# EAGLE board LEDSubMatrixHighDensity_scripttesting (EAGLE 9.6.2), part 1 of 2
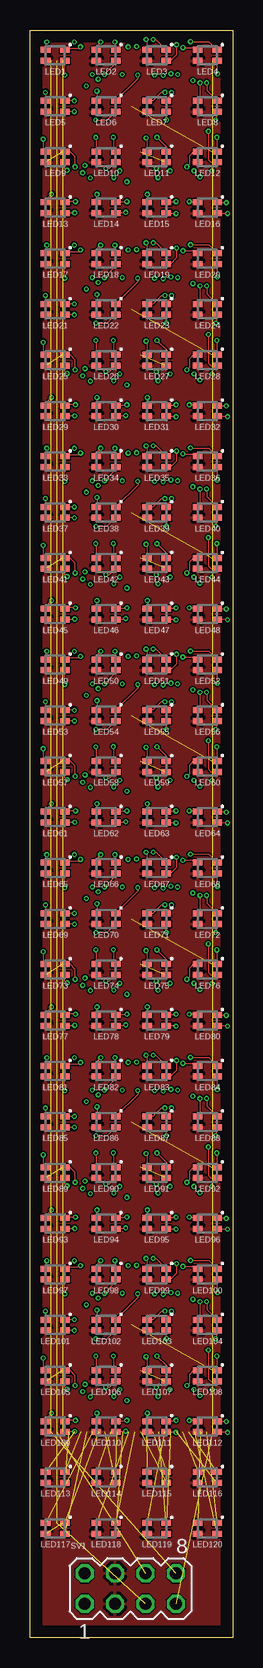
[diagram p0: board, top side]
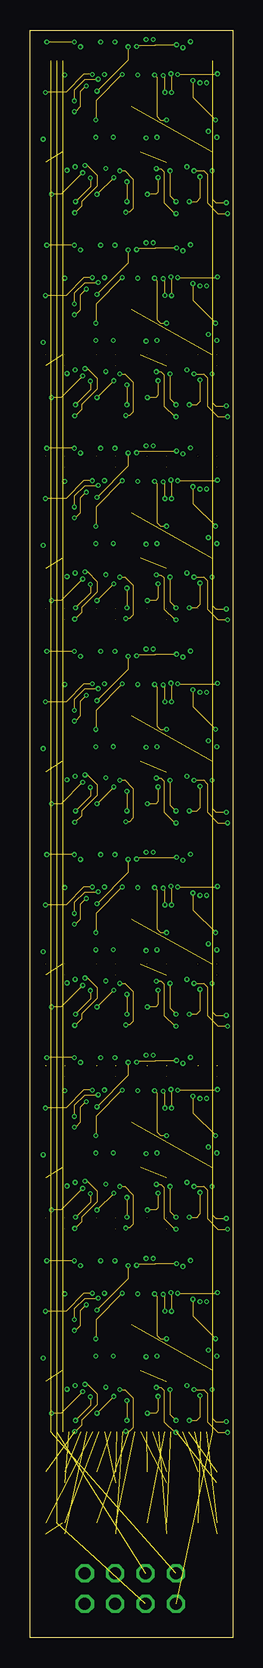
[diagram p1: board, inner layer InnerBottom]
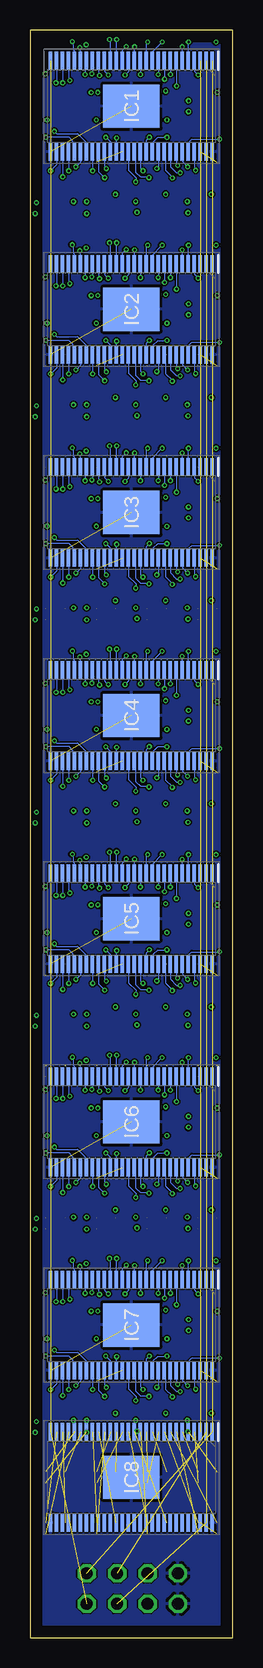
[diagram p2: board, bottom side, seen from below]

Size 16.93 x 134 mm. Coordinates in mm from the lower left corner, seen from the top.
Outline: 0,134 16.93,134 16.93,0 0,0 0,134
Copper layers (1+2*15+16): Top 0.035mm / dielectric 0.2mm / InnerTop 0.0175mm / dielectric 1.065mm / InnerBottom 0.0175mm / dielectric 0.2mm / Bottom 0.035mm
Design rules "jlcpcb_4layer_1oz": minimum track width 3.5mil, minimum drill 0.2mm, track to track 5mil, track to pad 0.2mm, pad to pad 5mil, via to via 6mil, smd to smd 5mil, copper to edge 40mil, drill to drill 6mil, minimum pad ring 10mil, minimum via ring 0.1mm, stop-mask expansion 4mil, vias tented up to drill 0mil, thermal gap 10mil

## Footprints (pad centres in the part's own frame; a part is rotated, then mirrored left to right if it is on the bottom)
SOP50P810X120-57N = smd 1.475 x 0.3: 1 -3.788,6.75; 2 -3.788,6.25; 3 -3.788,5.75; 4 -3.788,5.25; 5 -3.788,4.75; 6 -3.788,4.25; 7 -3.788,3.75; 8 -3.788,3.25; 9 -3.788,2.75; 10 -3.788,2.25; 11 -3.788,1.75; 12 -3.788,1.25; 13 -3.788,0.75; 14 -3.788,0.25; 15 -3.788,-0.25; 16 -3.788,-0.75; 17 -3.788,-1.25; 18 -3.788,-1.75; 19 -3.788,-2.25; 20 -3.788,-2.75; 21 -3.788,-3.25; 22 -3.788,-3.75; 23 -3.788,-4.25; 24 -3.788,-4.75; 25 -3.788,-5.25; 26 -3.788,-5.75; 27 -3.788,-6.25; 28 -3.788,-6.75; 29 3.788,-6.75; 30 3.788,-6.25; 31 3.788,-5.75; 32 3.788,-5.25; 33 3.788,-4.75; 34 3.788,-4.25; 35 3.788,-3.75; 36 3.788,-3.25; 37 3.788,-2.75; 38 3.788,-2.25; 39 3.788,-1.75; 40 3.788,-1.25; 41 3.788,-0.75; 42 3.788,-0.25; 43 3.788,0.25; 44 3.788,0.75; 45 3.788,1.25; 46 3.788,1.75; 47 3.788,2.25; 48 3.788,2.75; 49 3.788,3.25; 50 3.788,3.75; 51 3.788,4.25; 52 3.788,4.75; 53 3.788,5.25; 54 3.788,5.75; 55 3.788,6.25; 56 3.788,6.75 | smd 3.61 x 4.7: 57 0,0
B38G3RGB = smd 0.8 x 0.5: 1 0.8,0.45; 2 0.8,-0.45; 3 -0.8,-0.45; 4 -0.8,0.45
MA04-2 = drill 1.016 octagon: 1 -3.81,-1.27; 2 -3.81,1.27; 3 -1.27,-1.27; 4 -1.27,1.27; 5 1.27,-1.27; 6 1.27,1.27; 7 3.81,-1.27; 8 3.81,1.27

## Placement (x,y rotation side)
IC1  TLC5955DCAR  [SOP50P810X120-57N]  8.47,127.65 270 bottom
IC2  TLC5955DCAR  [SOP50P810X120-57N]  8.47,110.72 270 bottom
IC3  TLC5955DCAR  [SOP50P810X120-57N]  8.47,93.78 270 bottom
IC4  TLC5955DCAR  [SOP50P810X120-57N]  8.47,76.85 270 bottom
IC5  TLC5955DCAR  [SOP50P810X120-57N]  8.47,59.92 270 bottom
IC6  TLC5955DCAR  [SOP50P810X120-57N]  8.47,42.98 270 bottom
IC7  TLC5955DCAR  [SOP50P810X120-57N]  8.47,26.05 270 bottom
IC8  TLC5955DCAR  [SOP50P810X120-57N]  8.47,13.35 270 bottom
LED1  B38G3RGB  [B38G3RGB]  2.12,131.88 0 top
LED2  B38G3RGB  [B38G3RGB]  6.35,131.88 0 top
LED3  B38G3RGB  [B38G3RGB]  10.58,131.88 0 top
LED4  B38G3RGB  [B38G3RGB]  14.82,131.88 0 top
LED5  B38G3RGB  [B38G3RGB]  2.12,127.65 0 top
LED6  B38G3RGB  [B38G3RGB]  6.35,127.65 0 top
LED7  B38G3RGB  [B38G3RGB]  10.58,127.65 0 top
LED8  B38G3RGB  [B38G3RGB]  14.82,127.65 0 top
LED9  B38G3RGB  [B38G3RGB]  2.12,123.42 0 top
LED10  B38G3RGB  [B38G3RGB]  6.35,123.42 0 top
LED11  B38G3RGB  [B38G3RGB]  10.58,123.42 0 top
LED12  B38G3RGB  [B38G3RGB]  14.82,123.42 0 top
LED13  B38G3RGB  [B38G3RGB]  2.12,119.18 0 top
LED14  B38G3RGB  [B38G3RGB]  6.35,119.18 0 top
LED15  B38G3RGB  [B38G3RGB]  10.58,119.18 0 top
LED16  B38G3RGB  [B38G3RGB]  14.82,119.18 0 top
LED17  B38G3RGB  [B38G3RGB]  2.12,114.95 0 top
LED18  B38G3RGB  [B38G3RGB]  6.35,114.95 0 top
LED19  B38G3RGB  [B38G3RGB]  10.58,114.95 0 top
LED20  B38G3RGB  [B38G3RGB]  14.82,114.95 0 top
LED21  B38G3RGB  [B38G3RGB]  2.12,110.72 0 top
LED22  B38G3RGB  [B38G3RGB]  6.35,110.72 0 top
LED23  B38G3RGB  [B38G3RGB]  10.58,110.72 0 top
LED24  B38G3RGB  [B38G3RGB]  14.82,110.72 0 top
LED25  B38G3RGB  [B38G3RGB]  2.12,106.48 0 top
LED26  B38G3RGB  [B38G3RGB]  6.35,106.48 0 top
LED27  B38G3RGB  [B38G3RGB]  10.58,106.48 0 top
LED28  B38G3RGB  [B38G3RGB]  14.82,106.48 0 top
LED29  B38G3RGB  [B38G3RGB]  2.12,102.25 0 top
LED30  B38G3RGB  [B38G3RGB]  6.35,102.25 0 top
LED31  B38G3RGB  [B38G3RGB]  10.58,102.25 0 top
LED32  B38G3RGB  [B38G3RGB]  14.82,102.25 0 top
LED33  B38G3RGB  [B38G3RGB]  2.12,98.02 0 top
LED34  B38G3RGB  [B38G3RGB]  6.35,98.02 0 top
LED35  B38G3RGB  [B38G3RGB]  10.58,98.02 0 top
LED36  B38G3RGB  [B38G3RGB]  14.82,98.02 0 top
LED37  B38G3RGB  [B38G3RGB]  2.12,93.78 0 top
LED38  B38G3RGB  [B38G3RGB]  6.35,93.78 0 top
LED39  B38G3RGB  [B38G3RGB]  10.58,93.78 0 top
LED40  B38G3RGB  [B38G3RGB]  14.82,93.78 0 top
LED41  B38G3RGB  [B38G3RGB]  2.12,89.55 0 top
LED42  B38G3RGB  [B38G3RGB]  6.35,89.55 0 top
LED43  B38G3RGB  [B38G3RGB]  10.58,89.55 0 top
LED44  B38G3RGB  [B38G3RGB]  14.82,89.55 0 top
LED45  B38G3RGB  [B38G3RGB]  2.12,85.32 0 top
LED46  B38G3RGB  [B38G3RGB]  6.35,85.32 0 top
LED47  B38G3RGB  [B38G3RGB]  10.58,85.32 0 top
LED48  B38G3RGB  [B38G3RGB]  14.82,85.32 0 top
LED49  B38G3RGB  [B38G3RGB]  2.12,81.08 0 top
LED50  B38G3RGB  [B38G3RGB]  6.35,81.08 0 top
LED51  B38G3RGB  [B38G3RGB]  10.58,81.08 0 top
LED52  B38G3RGB  [B38G3RGB]  14.82,81.08 0 top
LED53  B38G3RGB  [B38G3RGB]  2.12,76.85 0 top
LED54  B38G3RGB  [B38G3RGB]  6.35,76.85 0 top
LED55  B38G3RGB  [B38G3RGB]  10.58,76.85 0 top
LED56  B38G3RGB  [B38G3RGB]  14.82,76.85 0 top
LED57  B38G3RGB  [B38G3RGB]  2.12,72.62 0 top
LED58  B38G3RGB  [B38G3RGB]  6.35,72.62 0 top
LED59  B38G3RGB  [B38G3RGB]  10.58,72.62 0 top
LED60  B38G3RGB  [B38G3RGB]  14.82,72.62 0 top
LED61  B38G3RGB  [B38G3RGB]  2.12,68.38 0 top
LED62  B38G3RGB  [B38G3RGB]  6.35,68.38 0 top
LED63  B38G3RGB  [B38G3RGB]  10.58,68.38 0 top
LED64  B38G3RGB  [B38G3RGB]  14.82,68.38 0 top
LED65  B38G3RGB  [B38G3RGB]  2.12,64.15 0 top
LED66  B38G3RGB  [B38G3RGB]  6.35,64.15 0 top
LED67  B38G3RGB  [B38G3RGB]  10.58,64.15 0 top
LED68  B38G3RGB  [B38G3RGB]  14.82,64.15 0 top
LED69  B38G3RGB  [B38G3RGB]  2.12,59.92 0 top
LED70  B38G3RGB  [B38G3RGB]  6.35,59.92 0 top
LED71  B38G3RGB  [B38G3RGB]  10.58,59.92 0 top
LED72  B38G3RGB  [B38G3RGB]  14.82,59.92 0 top
LED73  B38G3RGB  [B38G3RGB]  2.12,55.68 0 top
LED74  B38G3RGB  [B38G3RGB]  6.35,55.68 0 top
LED75  B38G3RGB  [B38G3RGB]  10.58,55.68 0 top
LED76  B38G3RGB  [B38G3RGB]  14.82,55.68 0 top
LED77  B38G3RGB  [B38G3RGB]  2.12,51.45 0 top
LED78  B38G3RGB  [B38G3RGB]  6.35,51.45 0 top
LED79  B38G3RGB  [B38G3RGB]  10.58,51.45 0 top
LED80  B38G3RGB  [B38G3RGB]  14.82,51.45 0 top
LED81  B38G3RGB  [B38G3RGB]  2.12,47.22 0 top
LED82  B38G3RGB  [B38G3RGB]  6.35,47.22 0 top
LED83  B38G3RGB  [B38G3RGB]  10.58,47.22 0 top
LED84  B38G3RGB  [B38G3RGB]  14.82,47.22 0 top
LED85  B38G3RGB  [B38G3RGB]  2.12,42.98 0 top
LED86  B38G3RGB  [B38G3RGB]  6.35,42.98 0 top
LED87  B38G3RGB  [B38G3RGB]  10.58,42.98 0 top
LED88  B38G3RGB  [B38G3RGB]  14.82,42.98 0 top
LED89  B38G3RGB  [B38G3RGB]  2.12,38.75 0 top
LED90  B38G3RGB  [B38G3RGB]  6.35,38.75 0 top
LED91  B38G3RGB  [B38G3RGB]  10.58,38.75 0 top
LED92  B38G3RGB  [B38G3RGB]  14.82,38.75 0 top
LED93  B38G3RGB  [B38G3RGB]  2.12,34.52 0 top
LED94  B38G3RGB  [B38G3RGB]  6.35,34.52 0 top
LED95  B38G3RGB  [B38G3RGB]  10.58,34.52 0 top
LED96  B38G3RGB  [B38G3RGB]  14.82,34.52 0 top
LED97  B38G3RGB  [B38G3RGB]  2.12,30.28 0 top
LED98  B38G3RGB  [B38G3RGB]  6.35,30.28 0 top
LED99  B38G3RGB  [B38G3RGB]  10.58,30.28 0 top
LED100  B38G3RGB  [B38G3RGB]  14.82,30.28 0 top
LED101  B38G3RGB  [B38G3RGB]  2.12,26.05 0 top
LED102  B38G3RGB  [B38G3RGB]  6.35,26.05 0 top
LED103  B38G3RGB  [B38G3RGB]  10.58,26.05 0 top
LED104  B38G3RGB  [B38G3RGB]  14.82,26.05 0 top
LED105  B38G3RGB  [B38G3RGB]  2.12,21.82 0 top
LED106  B38G3RGB  [B38G3RGB]  6.35,21.82 0 top
LED107  B38G3RGB  [B38G3RGB]  10.58,21.82 0 top
LED108  B38G3RGB  [B38G3RGB]  14.82,21.82 0 top
LED109  B38G3RGB  [B38G3RGB]  2.12,17.58 0 top
LED110  B38G3RGB  [B38G3RGB]  6.35,17.58 0 top
LED111  B38G3RGB  [B38G3RGB]  10.58,17.58 0 top
LED112  B38G3RGB  [B38G3RGB]  14.82,17.58 0 top
LED113  B38G3RGB  [B38G3RGB]  2.12,13.35 0 top
LED114  B38G3RGB  [B38G3RGB]  6.35,13.35 0 top
LED115  B38G3RGB  [B38G3RGB]  10.58,13.35 0 top
LED116  B38G3RGB  [B38G3RGB]  14.82,13.35 0 top
LED117  B38G3RGB  [B38G3RGB]  2.12,9.12 0 top
LED118  B38G3RGB  [B38G3RGB]  6.35,9.12 0 top
LED119  B38G3RGB  [B38G3RGB]  10.58,9.12 0 top
LED120  B38G3RGB  [B38G3RGB]  14.82,9.12 0 top
SV1  [MA04-2]  8.38,4.08 0 top

## Library data of the parts
IC1-IC8 = TLC5955DCAR; ARROW_PART_NUMBER: TLC5955DCAR; ARROW_PRICE-STOCK: https://www.arrow.com/en/products/tlc5955dcar/texas-instruments; DESCRIPTION: 48ch, 16bit PWM LED Driver with Dot-Correction, Brightness Control, Open/Short Detection; HEIGHT: 1.2mm; MANUFACTURER_NAME: Texas Instruments; MANUFACTURER_PART_NUMBER: TLC5955DCAR; MOUSER_PART_NUMBER: 595-TLC5955DCAR; MOUSER_PRICE-STOCK: https://www.mouser.co.uk/ProductDetail/Texas-Instruments/TLC5955DCAR?qs=%2Fd%252BFzHvH4c3zo%2FeGYG5n7g%3D%3D
LED1-LED120 = B38G3RGB; ARROW_PART_NUMBER: SML-LX0606IGC-TR; ARROW_PRICE-STOCK: https://www.arrow.com/en/products/sml-lx0606igc-tr/lumex; DESCRIPTION: Standard LEDs - SMD Surface Mount LEDs; HEIGHT: 0.7mm; MANUFACTURER_NAME: Lumex; MANUFACTURER_PART_NUMBER: SML-LX0606IGC-TR; MOUSER_PART_NUMBER: 696-SML-0606IGCTR; MOUSER_PRICE-STOCK: https://www.mouser.co.uk/ProductDetail/Lumex/SML-LX0606IGC-TR?qs=I1ILoAvtKy%252BVd7WFwiUkZQ%3D%3D
SV1 = con-lstb; OC_FARNELL: unknown; OC_NEWARK: unknown

## Nets
3V3: IC1.54 IC2.54 IC3.54 IC4.54 IC5.54 IC6.54 IC7.54 IC8.54 LED1.3 LED2.3 LED3.3 LED4.3 LED5.3 LED6.3 LED7.3 LED8.3 LED9.3 LED10.3 LED11.3 LED12.3 LED13.3 LED14.3 LED15.3 LED16.3 LED17.3 LED18.3 LED19.3 LED20.3 LED21.3 LED22.3 LED23.3 LED24.3 LED25.3 LED26.3 LED27.3 LED28.3 LED29.3 LED30.3 LED31.3 LED32.3 LED33.3 LED34.3 LED35.3 LED36.3 LED37.3 LED38.3 LED39.3 LED40.3 LED41.3 LED42.3 LED43.3 LED44.3 LED45.3 LED46.3 LED47.3 LED48.3 LED49.3 LED50.3 LED51.3 LED52.3 LED53.3 LED54.3 LED55.3 LED56.3 LED57.3 LED58.3 LED59.3 LED60.3 LED61.3 LED62.3 LED63.3 LED64.3 LED65.3 LED66.3 LED67.3 LED68.3 LED69.3 LED70.3 LED71.3 LED72.3 LED73.3 LED74.3 LED75.3 LED76.3 LED77.3 LED78.3 LED79.3 LED80.3 LED81.3 LED82.3 LED83.3 LED84.3 LED85.3 LED86.3 LED87.3 LED88.3 LED89.3 LED90.3 LED91.3 LED92.3 LED93.3 LED94.3 LED95.3 LED96.3 LED97.3 LED98.3 LED99.3 LED100.3 LED101.3 LED102.3 LED103.3 LED104.3 LED105.3 LED106.3 LED107.3 LED108.3 LED109.3 LED110.3 LED111.3 LED112.3 LED113.3 LED114.3 LED115.3 LED116.3 LED117.3 LED118.3 LED119.3 LED120.3 SV1.3 SV1.4
GND: IC1.29 IC1.56 IC1.57 IC2.29 IC2.56 IC2.57 IC3.29 IC3.56 IC3.57 IC4.29 IC4.56 IC4.57 IC5.29 IC5.56 IC5.57 IC6.29 IC6.56 IC6.57 IC7.29 IC7.56 IC7.57 IC8.29 IC8.56 IC8.57 SV1.1 SV1.2
GSCLK: IC1.55 IC2.55 IC3.55 IC4.55 IC5.55 IC6.55 IC7.55 IC8.55 SV1.5
LAT: IC1.3 IC2.3 IC3.3 IC4.3 IC5.3 IC6.3 IC7.3 IC8.3
N$352: IC8.53
N$353: IC8.52
N$354: IC8.51
N$355: IC8.50
N$356: IC8.49
N$357: IC8.48
N$358: IC8.47
N$359: IC8.46
N$360: IC8.45
N$361: IC8.44
N$362: IC8.43
N$363: IC8.42
N$364: IC8.41
N$365: IC8.40
N$366: IC8.39
N$367: IC8.38
N$368: IC8.37
N$369: IC8.36
N$370: IC8.35
N$371: IC8.34
N$372: IC8.33
N$373: IC8.32
N$374: IC8.31
N$375: IC8.30
N$LEDB1_IC1_PIN4: IC1.4 LED1.2
N$LEDB2_IC1_PIN10: IC1.10 LED2.2
N$LEDB3_IC1_PIN16: IC1.16 LED3.2
N$LEDB4_IC1_PIN22: IC1.22 LED4.2
N$LEDB5_IC1_PIN7: IC1.7 LED5.2
N$LEDB6_IC1_PIN13: IC1.13 LED6.2
N$LEDB7_IC1_PIN19: IC1.19 LED7.2
N$LEDB8_IC1_PIN25: IC1.25 LED8.2
N$LEDB9_IC1_PIN53: IC1.53 LED9.2
N$LEDB10_IC1_PIN47: IC1.47 LED10.2
N$LEDB11_IC1_PIN41: IC1.41 LED11.2
N$LEDB12_IC1_PIN35: IC1.35 LED12.2
N$LEDB13_IC1_PIN50: IC1.50 LED13.2
N$LEDB14_IC1_PIN44: IC1.44 LED14.2
N$LEDB15_IC1_PIN38: IC1.38 LED15.2
N$LEDB16_IC1_PIN32: IC1.32 LED16.2
N$LEDB17_IC2_PIN4: IC2.4 LED17.2
N$LEDB18_IC2_PIN10: IC2.10 LED18.2
N$LEDB19_IC2_PIN16: IC2.16 LED19.2
N$LEDB20_IC2_PIN22: IC2.22 LED20.2
N$LEDB21_IC2_PIN7: IC2.7 LED21.2
N$LEDB22_IC2_PIN13: IC2.13 LED22.2
N$LEDB23_IC2_PIN19: IC2.19 LED23.2
N$LEDB24_IC2_PIN25: IC2.25 LED24.2
N$LEDB25_IC2_PIN53: IC2.53 LED25.2
N$LEDB26_IC2_PIN47: IC2.47 LED26.2
N$LEDB27_IC2_PIN41: IC2.41 LED27.2
N$LEDB28_IC2_PIN35: IC2.35 LED28.2
N$LEDB29_IC2_PIN50: IC2.50 LED29.2
N$LEDB30_IC2_PIN44: IC2.44 LED30.2
N$LEDB31_IC2_PIN38: IC2.38 LED31.2
N$LEDB32_IC2_PIN32: IC2.32 LED32.2
N$LEDB33_IC3_PIN4: IC3.4 LED33.2
N$LEDB34_IC3_PIN10: IC3.10 LED34.2
N$LEDB35_IC3_PIN16: IC3.16 LED35.2
N$LEDB36_IC3_PIN22: IC3.22 LED36.2
N$LEDB37_IC3_PIN7: IC3.7 LED37.2
N$LEDB38_IC3_PIN13: IC3.13 LED38.2
N$LEDB39_IC3_PIN19: IC3.19 LED39.2
N$LEDB40_IC3_PIN25: IC3.25 LED40.2
N$LEDB41_IC3_PIN53: IC3.53 LED41.2
N$LEDB42_IC3_PIN47: IC3.47 LED42.2
N$LEDB43_IC3_PIN41: IC3.41 LED43.2
N$LEDB44_IC3_PIN35: IC3.35 LED44.2
N$LEDB45_IC3_PIN50: IC3.50 LED45.2
N$LEDB46_IC3_PIN44: IC3.44 LED46.2
N$LEDB47_IC3_PIN38: IC3.38 LED47.2
N$LEDB48_IC3_PIN32: IC3.32 LED48.2
N$LEDB49_IC4_PIN4: IC4.4 LED49.2
N$LEDB50_IC4_PIN10: IC4.10 LED50.2
N$LEDB51_IC4_PIN16: IC4.16 LED51.2
N$LEDB52_IC4_PIN22: IC4.22 LED52.2
N$LEDB53_IC4_PIN7: IC4.7 LED53.2
N$LEDB54_IC4_PIN13: IC4.13 LED54.2
N$LEDB55_IC4_PIN19: IC4.19 LED55.2
N$LEDB56_IC4_PIN25: IC4.25 LED56.2
N$LEDB57_IC4_PIN53: IC4.53 LED57.2
N$LEDB58_IC4_PIN47: IC4.47 LED58.2
N$LEDB59_IC4_PIN41: IC4.41 LED59.2
N$LEDB60_IC4_PIN35: IC4.35 LED60.2
N$LEDB61_IC4_PIN50: IC4.50 LED61.2
N$LEDB62_IC4_PIN44: IC4.44 LED62.2
N$LEDB63_IC4_PIN38: IC4.38 LED63.2
N$LEDB64_IC4_PIN32: IC4.32 LED64.2
N$LEDB65_IC5_PIN4: IC5.4 LED65.2
N$LEDB66_IC5_PIN10: IC5.10 LED66.2
N$LEDB67_IC5_PIN16: IC5.16 LED67.2
N$LEDB68_IC5_PIN22: IC5.22 LED68.2
N$LEDB69_IC5_PIN7: IC5.7 LED69.2
N$LEDB70_IC5_PIN13: IC5.13 LED70.2
N$LEDB71_IC5_PIN19: IC5.19 LED71.2
N$LEDB72_IC5_PIN25: IC5.25 LED72.2
N$LEDB73_IC5_PIN53: IC5.53 LED73.2
N$LEDB74_IC5_PIN47: IC5.47 LED74.2
N$LEDB75_IC5_PIN41: IC5.41 LED75.2
N$LEDB76_IC5_PIN35: IC5.35 LED76.2
N$LEDB77_IC5_PIN50: IC5.50 LED77.2
N$LEDB78_IC5_PIN44: IC5.44 LED78.2
N$LEDB79_IC5_PIN38: IC5.38 LED79.2
N$LEDB80_IC5_PIN32: IC5.32 LED80.2
N$LEDB81_IC6_PIN4: IC6.4 LED81.2
N$LEDB82_IC6_PIN10: IC6.10 LED82.2
N$LEDB83_IC6_PIN16: IC6.16 LED83.2
N$LEDB84_IC6_PIN22: IC6.22 LED84.2
N$LEDB85_IC6_PIN7: IC6.7 LED85.2
N$LEDB86_IC6_PIN13: IC6.13 LED86.2
N$LEDB87_IC6_PIN19: IC6.19 LED87.2
N$LEDB88_IC6_PIN25: IC6.25 LED88.2
N$LEDB89_IC6_PIN53: IC6.53 LED89.2
N$LEDB90_IC6_PIN47: IC6.47 LED90.2
N$LEDB91_IC6_PIN41: IC6.41 LED91.2
N$LEDB92_IC6_PIN35: IC6.35 LED92.2
N$LEDB93_IC6_PIN50: IC6.50 LED93.2
N$LEDB94_IC6_PIN44: IC6.44 LED94.2
N$LEDB95_IC6_PIN38: IC6.38 LED95.2
N$LEDB96_IC6_PIN32: IC6.32 LED96.2
N$LEDB97_IC7_PIN4: IC7.4 LED97.2
N$LEDB98_IC7_PIN10: IC7.10 LED98.2
N$LEDB99_IC7_PIN16: IC7.16 LED99.2
N$LEDB100_IC7_PIN22: IC7.22 LED100.2
N$LEDB101_IC7_PIN7: IC7.7 LED101.2
N$LEDB102_IC7_PIN13: IC7.13 LED102.2
N$LEDB103_IC7_PIN19: IC7.19 LED103.2
N$LEDB104_IC7_PIN25: IC7.25 LED104.2
N$LEDB105_IC7_PIN53: IC7.53 LED105.2
N$LEDB106_IC7_PIN47: IC7.47 LED106.2
N$LEDB107_IC7_PIN41: IC7.41 LED107.2
N$LEDB108_IC7_PIN35: IC7.35 LED108.2
N$LEDB109_IC7_PIN50: IC7.50 LED109.2
N$LEDB110_IC7_PIN44: IC7.44 LED110.2
N$LEDB111_IC7_PIN38: IC7.38 LED111.2
N$LEDB112_IC7_PIN32: IC7.32 LED112.2
N$LEDB113_IC8_PIN4: IC8.4 LED113.2
N$LEDB114_IC8_PIN10: IC8.10 LED114.2
N$LEDB115_IC8_PIN16: IC8.16 LED115.2
N$LEDB116_IC8_PIN22: IC8.22 LED116.2
N$LEDB117_IC8_PIN7: IC8.7 LED117.2
N$LEDB118_IC8_PIN13: IC8.13 LED118.2
N$LEDB119_IC8_PIN19: IC8.19 LED119.2
N$LEDB120_IC8_PIN25: IC8.25 LED120.2
N$LEDG1_IC1_PIN6: IC1.6 LED1.1
N$LEDG2_IC1_PIN12: IC1.12 LED2.1
N$LEDG3_IC1_PIN18: IC1.18 LED3.1
N$LEDG4_IC1_PIN24: IC1.24 LED4.1
N$LEDG5_IC1_PIN9: IC1.9 LED5.1
N$LEDG6_IC1_PIN15: IC1.15 LED6.1
N$LEDG7_IC1_PIN21: IC1.21 LED7.1
N$LEDG8_IC1_PIN27: IC1.27 LED8.1
N$LEDG9_IC1_PIN51: IC1.51 LED9.1
N$LEDG10_IC1_PIN45: IC1.45 LED10.1
N$LEDG11_IC1_PIN39: IC1.39 LED11.1
N$LEDG12_IC1_PIN33: IC1.33 LED12.1
N$LEDG13_IC1_PIN48: IC1.48 LED13.1
N$LEDG14_IC1_PIN42: IC1.42 LED14.1
N$LEDG15_IC1_PIN36: IC1.36 LED15.1
N$LEDG16_IC1_PIN30: IC1.30 LED16.1
N$LEDG17_IC2_PIN6: IC2.6 LED17.1
N$LEDG18_IC2_PIN12: IC2.12 LED18.1
N$LEDG19_IC2_PIN18: IC2.18 LED19.1
N$LEDG20_IC2_PIN24: IC2.24 LED20.1
N$LEDG21_IC2_PIN9: IC2.9 LED21.1
N$LEDG22_IC2_PIN15: IC2.15 LED22.1
N$LEDG23_IC2_PIN21: IC2.21 LED23.1
N$LEDG24_IC2_PIN27: IC2.27 LED24.1
N$LEDG25_IC2_PIN51: IC2.51 LED25.1
N$LEDG26_IC2_PIN45: IC2.45 LED26.1
N$LEDG27_IC2_PIN39: IC2.39 LED27.1
N$LEDG28_IC2_PIN33: IC2.33 LED28.1
N$LEDG29_IC2_PIN48: IC2.48 LED29.1
N$LEDG30_IC2_PIN42: IC2.42 LED30.1
N$LEDG31_IC2_PIN36: IC2.36 LED31.1
N$LEDG32_IC2_PIN30: IC2.30 LED32.1
N$LEDG33_IC3_PIN6: IC3.6 LED33.1
N$LEDG34_IC3_PIN12: IC3.12 LED34.1
N$LEDG35_IC3_PIN18: IC3.18 LED35.1
N$LEDG36_IC3_PIN24: IC3.24 LED36.1
N$LEDG37_IC3_PIN9: IC3.9 LED37.1
N$LEDG38_IC3_PIN15: IC3.15 LED38.1
N$LEDG39_IC3_PIN21: IC3.21 LED39.1
N$LEDG40_IC3_PIN27: IC3.27 LED40.1
N$LEDG41_IC3_PIN51: IC3.51 LED41.1
N$LEDG42_IC3_PIN45: IC3.45 LED42.1
N$LEDG43_IC3_PIN39: IC3.39 LED43.1
N$LEDG44_IC3_PIN33: IC3.33 LED44.1
N$LEDG45_IC3_PIN48: IC3.48 LED45.1
N$LEDG46_IC3_PIN42: IC3.42 LED46.1
N$LEDG47_IC3_PIN36: IC3.36 LED47.1
N$LEDG48_IC3_PIN30: IC3.30 LED48.1
N$LEDG49_IC4_PIN6: IC4.6 LED49.1
N$LEDG50_IC4_PIN12: IC4.12 LED50.1
N$LEDG51_IC4_PIN18: IC4.18 LED51.1
N$LEDG52_IC4_PIN24: IC4.24 LED52.1
N$LEDG53_IC4_PIN9: IC4.9 LED53.1
N$LEDG54_IC4_PIN15: IC4.15 LED54.1
N$LEDG55_IC4_PIN21: IC4.21 LED55.1
N$LEDG56_IC4_PIN27: IC4.27 LED56.1
N$LEDG57_IC4_PIN51: IC4.51 LED57.1
N$LEDG58_IC4_PIN45: IC4.45 LED58.1
N$LEDG59_IC4_PIN39: IC4.39 LED59.1
N$LEDG60_IC4_PIN33: IC4.33 LED60.1
N$LEDG61_IC4_PIN48: IC4.48 LED61.1
N$LEDG62_IC4_PIN42: IC4.42 LED62.1
N$LEDG63_IC4_PIN36: IC4.36 LED63.1
N$LEDG64_IC4_PIN30: IC4.30 LED64.1
N$LEDG65_IC5_PIN6: IC5.6 LED65.1
N$LEDG66_IC5_PIN12: IC5.12 LED66.1
N$LEDG67_IC5_PIN18: IC5.18 LED67.1
N$LEDG68_IC5_PIN24: IC5.24 LED68.1
N$LEDG69_IC5_PIN9: IC5.9 LED69.1
N$LEDG70_IC5_PIN15: IC5.15 LED70.1
N$LEDG71_IC5_PIN21: IC5.21 LED71.1
N$LEDG72_IC5_PIN27: IC5.27 LED72.1
N$LEDG73_IC5_PIN51: IC5.51 LED73.1
N$LEDG74_IC5_PIN45: IC5.45 LED74.1
N$LEDG75_IC5_PIN39: IC5.39 LED75.1
N$LEDG76_IC5_PIN33: IC5.33 LED76.1
N$LEDG77_IC5_PIN48: IC5.48 LED77.1
N$LEDG78_IC5_PIN42: IC5.42 LED78.1
N$LEDG79_IC5_PIN36: IC5.36 LED79.1
N$LEDG80_IC5_PIN30: IC5.30 LED80.1
N$LEDG81_IC6_PIN6: IC6.6 LED81.1
N$LEDG82_IC6_PIN12: IC6.12 LED82.1
N$LEDG83_IC6_PIN18: IC6.18 LED83.1
N$LEDG84_IC6_PIN24: IC6.24 LED84.1
N$LEDG85_IC6_PIN9: IC6.9 LED85.1
N$LEDG86_IC6_PIN15: IC6.15 LED86.1
N$LEDG87_IC6_PIN21: IC6.21 LED87.1
N$LEDG88_IC6_PIN27: IC6.27 LED88.1
N$LEDG89_IC6_PIN51: IC6.51 LED89.1
N$LEDG90_IC6_PIN45: IC6.45 LED90.1
N$LEDG91_IC6_PIN39: IC6.39 LED91.1
N$LEDG92_IC6_PIN33: IC6.33 LED92.1
N$LEDG93_IC6_PIN48: IC6.48 LED93.1
N$LEDG94_IC6_PIN42: IC6.42 LED94.1
N$LEDG95_IC6_PIN36: IC6.36 LED95.1
N$LEDG96_IC6_PIN30: IC6.30 LED96.1
N$LEDG97_IC7_PIN6: IC7.6 LED97.1
N$LEDG98_IC7_PIN12: IC7.12 LED98.1
N$LEDG99_IC7_PIN18: IC7.18 LED99.1
N$LEDG100_IC7_PIN24: IC7.24 LED100.1
N$LEDG101_IC7_PIN9: IC7.9 LED101.1
N$LEDG102_IC7_PIN15: IC7.15 LED102.1
N$LEDG103_IC7_PIN21: IC7.21 LED103.1
N$LEDG104_IC7_PIN27: IC7.27 LED104.1
N$LEDG105_IC7_PIN51: IC7.51 LED105.1
N$LEDG106_IC7_PIN45: IC7.45 LED106.1
N$LEDG107_IC7_PIN39: IC7.39 LED107.1
N$LEDG108_IC7_PIN33: IC7.33 LED108.1
N$LEDG109_IC7_PIN48: IC7.48 LED109.1
N$LEDG110_IC7_PIN42: IC7.42 LED110.1
N$LEDG111_IC7_PIN36: IC7.36 LED111.1
N$LEDG112_IC7_PIN30: IC7.30 LED112.1
N$LEDG113_IC8_PIN6: IC8.6 LED113.1
N$LEDG114_IC8_PIN12: IC8.12 LED114.1
N$LEDG115_IC8_PIN18: IC8.18 LED115.1
N$LEDG116_IC8_PIN24: IC8.24 LED116.1
N$LEDG117_IC8_PIN9: IC8.9 LED117.1
N$LEDG118_IC8_PIN15: IC8.15 LED118.1
N$LEDG119_IC8_PIN21: IC8.21 LED119.1
N$LEDG120_IC8_PIN27: IC8.27 LED120.1
N$LEDR1_IC1_PIN5: IC1.5 LED1.4
N$LEDR2_IC1_PIN11: IC1.11 LED2.4
N$LEDR3_IC1_PIN17: IC1.17 LED3.4
N$LEDR4_IC1_PIN23: IC1.23 LED4.4
N$LEDR5_IC1_PIN8: IC1.8 LED5.4
N$LEDR6_IC1_PIN14: IC1.14 LED6.4
N$LEDR7_IC1_PIN20: IC1.20 LED7.4
N$LEDR8_IC1_PIN26: IC1.26 LED8.4
N$LEDR9_IC1_PIN52: IC1.52 LED9.4
N$LEDR10_IC1_PIN46: IC1.46 LED10.4
N$LEDR11_IC1_PIN40: IC1.40 LED11.4
N$LEDR12_IC1_PIN34: IC1.34 LED12.4
N$LEDR13_IC1_PIN49: IC1.49 LED13.4
N$LEDR14_IC1_PIN43: IC1.43 LED14.4
N$LEDR15_IC1_PIN37: IC1.37 LED15.4
N$LEDR16_IC1_PIN31: IC1.31 LED16.4
N$LEDR17_IC2_PIN5: IC2.5 LED17.4
N$LEDR18_IC2_PIN11: IC2.11 LED18.4
N$LEDR19_IC2_PIN17: IC2.17 LED19.4
N$LEDR20_IC2_PIN23: IC2.23 LED20.4
N$LEDR21_IC2_PIN8: IC2.8 LED21.4
N$LEDR22_IC2_PIN14: IC2.14 LED22.4
N$LEDR23_IC2_PIN20: IC2.20 LED23.4
N$LEDR24_IC2_PIN26: IC2.26 LED24.4
N$LEDR25_IC2_PIN52: IC2.52 LED25.4
N$LEDR26_IC2_PIN46: IC2.46 LED26.4
N$LEDR27_IC2_PIN40: IC2.40 LED27.4
N$LEDR28_IC2_PIN34: IC2.34 LED28.4
N$LEDR29_IC2_PIN49: IC2.49 LED29.4
N$LEDR30_IC2_PIN43: IC2.43 LED30.4
N$LEDR31_IC2_PIN37: IC2.37 LED31.4
N$LEDR32_IC2_PIN31: IC2.31 LED32.4
N$LEDR33_IC3_PIN5: IC3.5 LED33.4
N$LEDR34_IC3_PIN11: IC3.11 LED34.4
N$LEDR35_IC3_PIN17: IC3.17 LED35.4
N$LEDR36_IC3_PIN23: IC3.23 LED36.4
N$LEDR37_IC3_PIN8: IC3.8 LED37.4
N$LEDR38_IC3_PIN14: IC3.14 LED38.4
N$LEDR39_IC3_PIN20: IC3.20 LED39.4
N$LEDR40_IC3_PIN26: IC3.26 LED40.4
N$LEDR41_IC3_PIN52: IC3.52 LED41.4
N$LEDR42_IC3_PIN46: IC3.46 LED42.4
N$LEDR43_IC3_PIN40: IC3.40 LED43.4
N$LEDR44_IC3_PIN34: IC3.34 LED44.4
N$LEDR45_IC3_PIN49: IC3.49 LED45.4
N$LEDR46_IC3_PIN43: IC3.43 LED46.4
N$LEDR47_IC3_PIN37: IC3.37 LED47.4
N$LEDR48_IC3_PIN31: IC3.31 LED48.4
N$LEDR49_IC4_PIN5: IC4.5 LED49.4
N$LEDR50_IC4_PIN11: IC4.11 LED50.4
N$LEDR51_IC4_PIN17: IC4.17 LED51.4
N$LEDR52_IC4_PIN23: IC4.23 LED52.4
N$LEDR53_IC4_PIN8: IC4.8 LED53.4
N$LEDR54_IC4_PIN14: IC4.14 LED54.4
N$LEDR55_IC4_PIN20: IC4.20 LED55.4
N$LEDR56_IC4_PIN26: IC4.26 LED56.4
N$LEDR57_IC4_PIN52: IC4.52 LED57.4
N$LEDR58_IC4_PIN46: IC4.46 LED58.4
N$LEDR59_IC4_PIN40: IC4.40 LED59.4
N$LEDR60_IC4_PIN34: IC4.34 LED60.4
N$LEDR61_IC4_PIN49: IC4.49 LED61.4
N$LEDR62_IC4_PIN43: IC4.43 LED62.4
N$LEDR63_IC4_PIN37: IC4.37 LED63.4
N$LEDR64_IC4_PIN31: IC4.31 LED64.4
N$LEDR65_IC5_PIN5: IC5.5 LED65.4
N$LEDR66_IC5_PIN11: IC5.11 LED66.4
N$LEDR67_IC5_PIN17: IC5.17 LED67.4
N$LEDR68_IC5_PIN23: IC5.23 LED68.4
N$LEDR69_IC5_PIN8: IC5.8 LED69.4
N$LEDR70_IC5_PIN14: IC5.14 LED70.4
N$LEDR71_IC5_PIN20: IC5.20 LED71.4
N$LEDR72_IC5_PIN26: IC5.26 LED72.4
N$LEDR73_IC5_PIN52: IC5.52 LED73.4
N$LEDR74_IC5_PIN46: IC5.46 LED74.4
N$LEDR75_IC5_PIN40: IC5.40 LED75.4
N$LEDR76_IC5_PIN34: IC5.34 LED76.4
N$LEDR77_IC5_PIN49: IC5.49 LED77.4
N$LEDR78_IC5_PIN43: IC5.43 LED78.4
N$LEDR79_IC5_PIN37: IC5.37 LED79.4
N$LEDR80_IC5_PIN31: IC5.31 LED80.4
N$LEDR81_IC6_PIN5: IC6.5 LED81.4
N$LEDR82_IC6_PIN11: IC6.11 LED82.4
N$LEDR83_IC6_PIN17: IC6.17 LED83.4
N$LEDR84_IC6_PIN23: IC6.23 LED84.4
N$LEDR85_IC6_PIN8: IC6.8 LED85.4
N$LEDR86_IC6_PIN14: IC6.14 LED86.4
N$LEDR87_IC6_PIN20: IC6.20 LED87.4
N$LEDR88_IC6_PIN26: IC6.26 LED88.4
N$LEDR89_IC6_PIN52: IC6.52 LED89.4
N$LEDR90_IC6_PIN46: IC6.46 LED90.4
N$LEDR91_IC6_PIN40: IC6.40 LED91.4
N$LEDR92_IC6_PIN34: IC6.34 LED92.4
N$LEDR93_IC6_PIN49: IC6.49 LED93.4
N$LEDR94_IC6_PIN43: IC6.43 LED94.4
N$LEDR95_IC6_PIN37: IC6.37 LED95.4
N$LEDR96_IC6_PIN31: IC6.31 LED96.4
N$LEDR97_IC7_PIN5: IC7.5 LED97.4
N$LEDR98_IC7_PIN11: IC7.11 LED98.4
N$LEDR99_IC7_PIN17: IC7.17 LED99.4
N$LEDR100_IC7_PIN23: IC7.23 LED100.4
N$LEDR101_IC7_PIN8: IC7.8 LED101.4
N$LEDR102_IC7_PIN14: IC7.14 LED102.4
N$LEDR103_IC7_PIN20: IC7.20 LED103.4
N$LEDR104_IC7_PIN26: IC7.26 LED104.4
N$LEDR105_IC7_PIN52: IC7.52 LED105.4
N$LEDR106_IC7_PIN46: IC7.46 LED106.4
N$LEDR107_IC7_PIN40: IC7.40 LED107.4
N$LEDR108_IC7_PIN34: IC7.34 LED108.4
N$LEDR109_IC7_PIN49: IC7.49 LED109.4
N$LEDR110_IC7_PIN43: IC7.43 LED110.4
N$LEDR111_IC7_PIN37: IC7.37 LED111.4
N$LEDR112_IC7_PIN31: IC7.31 LED112.4
N$LEDR113_IC8_PIN5: IC8.5 LED113.4
N$LEDR114_IC8_PIN11: IC8.11 LED114.4
N$LEDR115_IC8_PIN17: IC8.17 LED115.4
N$LEDR116_IC8_PIN23: IC8.23 LED116.4
N$LEDR117_IC8_PIN8: IC8.8 LED117.4
N$LEDR118_IC8_PIN14: IC8.14 LED118.4
N$LEDR119_IC8_PIN20: IC8.20 LED119.4
N$LEDR120_IC8_PIN26: IC8.26 LED120.4
SCLK: IC1.2 IC2.2 IC3.2 IC4.2 IC5.2 IC6.2 IC7.2 IC8.2 SV1.6
SIN_MCU: IC1.1 IC2.1 IC3.1 IC4.1 IC5.1 IC6.1 IC7.1 IC8.1 SV1.8
SOUT1: IC1.28 IC2.28 IC3.28 IC4.28 IC5.28 IC6.28 IC7.28 IC8.28 SV1.7

## Tracks (layer width: path | path; a pad name or v marks a point on that pad's centre or on a via)
3V3  (8 unrouted)
  pour Top: -2.83,140 19,140 19,-6 -2.83,-6
GND  (7 unrouted)
  pour Bottom: -2.57,140 19,140 19,-6 -2.57,-6
GSCLK  (8 unrouted)
LAT  (7 unrouted)
N$LEDB1_IC1_PIN4  (via drill 0.2 pad 0.4)
  Top 0.1: v2.9,130.25 2.9,131.42 LED1.2
  Bottom 0.1: IC1.4 3.22,130.56 v2.9,130.25
N$LEDB2_IC1_PIN10  (via drill 0.2)
  Top 0.1: v6.22,130.3 7.15,131.23 LED2.2
  Bottom 0.1: IC1.10 v6.22,130.3
N$LEDB3_IC1_PIN16  (via drill 0.2)
  Top 0.1: v12.24,132.77 12.24,131.94 11.73,131.43 LED3.2
  InnerBottom 0.1: v12.24,132.77 10.5,132.77 10.47,132.75 9.02,132.75 v8.9,132.63
  Bottom 0.1: IC1.16 9.22,132.31 v8.9,132.63
N$LEDB4_IC1_PIN22  (via drill 0.2)
  Top 0.1: v15.65,130.35 15.65,131.4 LED4.2
  InnerBottom 0.1: v12.33,130.3 15.61,130.3 v15.65,130.35
  Bottom 0.1: IC1.22 12.32,131.34 12.32,130.6 12.33,130.59 v12.33,130.3
N$LEDB5_IC1_PIN7  (via drill 0.2 pad 0.4)
  Top 0.1: v3.7,127.2 LED5.2
  InnerBottom 0.1: v4.7,129.34 4.2,128.84 4.2,127.6 3.8,127.2 v3.7,127.2
  Bottom 0.1: IC1.7 4.7,131.42 v4.7,129.34 | v4.7,129.34
N$LEDB6_IC1_PIN13  (via drill 0.2)
  Top 0.1: v5.5,126.5 6.45,126.5 LED6.2
  InnerBottom 0.1: v7.71,130.29 5.5,128.09 v5.5,126.5
  Bottom 0.1: IC1.13 7.72,130.3 v7.71,130.29
N$LEDB7_IC1_PIN19  (via drill 0.2)
  Top 0.1: v11.4,126.5 11.38,126.52 LED7.2
  InnerBottom 0.1: v10.4,130.25 10.6,130.05 10.6,126.8 10.9,126.5 v11.4,126.5
  Bottom 0.1: IC1.19 10.72,130.55 10.7,130.55 v10.4,130.25
N$LEDB8_IC1_PIN25  (via drill 0.2)
  Top 0.1: v15.5,126.5 15.62,126.62 LED8.2
  InnerBottom 0.1: v13.6,129.79 13.6,128.4 v15.5,126.5
  Bottom 0.1: IC1.25 13.72,129.91 v13.6,129.79
N$LEDB9_IC1_PIN53  (via drill 0.2)
  Top 0.1: v3.1,122.3 2.92,122.48 LED9.2
  Bottom 0.1: IC1.53 3.22,122.42 v3.1,122.3
N$LEDB10_IC1_PIN47  (via drill 0.2)
  Top 0.1: v6.34,122.46 6.65,122.46 LED10.2
  Bottom 0.1: IC1.47 6.22,122.58 v6.34,122.46
N$LEDB11_IC1_PIN41  (1 unrouted)
N$LEDB12_IC1_PIN35  (via drill 0.2)
  Top 0.1: v14.9,125.56 14.9,123.18 15.11,122.97 LED12.2
  Bottom 0.1: IC1.35 12.22,124.6 12.97,125.36 14.7,125.36 v14.9,125.56
N$LEDB13_IC1_PIN50  (via drill 0.2)
  Top 0.1: v3.74,118.76 3.71,118.73 LED13.2
  InnerBottom 0.1: v4.59,122.71 4.79,122.71 5.59,121.91 5.59,120.99 4.3,119.7 4.3,119.3 3.76,118.76 v3.74,118.76
  Bottom 0.1: IC1.50 4.72,122.83 v4.59,122.71
N$LEDB14_IC1_PIN44  (via drill 0.2)
  Top 0.1: v8,118.8 7.93,118.73 LED14.2
  InnerBottom 0.1: v7.5,122.26 7.92,122.26 8.6,121.58 8.6,119.1 8.3,118.8 v8,118.8
  Bottom 0.1: IC1.44 7.72,122.48 v7.5,122.26
N$LEDB15_IC1_PIN38  (via drill 0.2)
  Top 0.1: v12.2,118.7 11.42,118.7 LED15.2
  InnerBottom 0.1: v10.55,122.45 10.95,122.45 11.2,122.2 11.2,119.6 12.1,118.7 v12.2,118.7
  Bottom 0.1: IC1.38 10.72,122.61 v10.55,122.45
N$LEDB16_IC1_PIN32  (via drill 0.2)
  Top 0.1: v16.5,118.7 15.65,118.7 LED16.2
  InnerBottom 0.1: v13.7,122.26 14.5,122.26 14.8,121.96 14.8,119.6 15.7,118.7 v16.5,118.7
  Bottom 0.1: IC1.32 13.72,122.28 v13.7,122.26
N$LEDB17_IC2_PIN4  (via drill 0.2 pad 0.4)
  Top 0.1: v2.9,113.31 2.9,114.48 LED17.2
  Bottom 0.1: IC2.4 3.22,113.63 v2.9,113.31
N$LEDB18_IC2_PIN10  (via drill 0.2)
  Top 0.1: v6.22,113.37 7.15,114.3 LED18.2
  Bottom 0.1: IC2.10 v6.22,113.37
N$LEDB19_IC2_PIN16  (via drill 0.2)
  Top 0.1: v12.24,115.84 12.24,115 11.73,114.5 LED19.2
  InnerBottom 0.1: v12.24,115.84 10.5,115.84 10.47,115.81 9.02,115.81 v8.9,115.7
  Bottom 0.1: IC2.16 9.22,115.38 v8.9,115.7
N$LEDB20_IC2_PIN22  (via drill 0.2)
  Top 0.1: v15.65,113.41 15.65,114.46 LED20.2
  InnerBottom 0.1: v12.33,113.36 15.61,113.36 v15.65,113.41
  Bottom 0.1: IC2.22 12.32,114.41 12.32,113.66 12.33,113.65 v12.33,113.36
N$LEDB21_IC2_PIN7  (via drill 0.2 pad 0.4)
  Top 0.1: v3.7,110.27 LED21.2
  InnerBottom 0.1: v4.7,112.41 4.2,111.91 4.2,110.67 3.8,110.27 v3.7,110.27
  Bottom 0.1: IC2.7 4.7,114.49 v4.7,112.41 | v4.7,112.41
N$LEDB22_IC2_PIN13  (via drill 0.2)
  Top 0.1: v5.5,109.56 6.45,109.56 LED22.2
  InnerBottom 0.1: v7.71,113.36 5.5,111.15 v5.5,109.56
  Bottom 0.1: IC2.13 v7.72,113.37 v7.71,113.36
N$LEDB23_IC2_PIN19  (via drill 0.2)
  Top 0.1: v11.4,109.57 11.38,109.58 LED23.2
  InnerBottom 0.1: v10.4,113.31 10.6,113.11 10.6,109.87 10.9,109.57 v11.4,109.57
  Bottom 0.1: IC2.19 10.72,113.61 10.7,113.61 v10.4,113.31
N$LEDB24_IC2_PIN25  (via drill 0.2)
  Top 0.1: v15.5,109.57 15.62,109.68 LED24.2
  InnerBottom 0.1: v13.6,112.86 13.6,111.47 v15.5,109.57
  Bottom 0.1: IC2.25 13.72,112.98 v13.6,112.86
N$LEDB25_IC2_PIN53  (via drill 0.2)  (1 unrouted)
  Top 0.1: v3.1,105.37 2.92,105.55 LED25.2
  Bottom 0.1: IC2.53 3.22,105.48 v3.1,105.37
N$LEDB26_IC2_PIN47  (via drill 0.2)  (1 unrouted)
  Top 0.1: v6.34,105.53 6.65,105.53 LED26.2
  Bottom 0.1: IC2.47 6.22,105.65 v6.34,105.53
N$LEDB27_IC2_PIN41  (1 unrouted)
N$LEDB28_IC2_PIN35  (via drill 0.2)  (1 unrouted)
  Top 0.1: v14.9,108.62 14.9,106.25 15.11,106.03 LED28.2
  Bottom 0.1: IC2.35 12.22,107.67 12.97,108.42 14.7,108.42 v14.9,108.62
N$LEDB29_IC2_PIN50  (via drill 0.2)
  Top 0.1: v3.74,101.83 3.71,101.8 LED29.2
  InnerBottom 0.1: v4.59,105.78 4.79,105.78 5.59,104.97 5.59,104.06 4.3,102.77 4.3,102.37 3.76,101.83 v3.74,101.83
  Bottom 0.1: IC2.50 4.72,105.9 v4.59,105.78
N$LEDB30_IC2_PIN44  (via drill 0.2)
  Top 0.1: v8,101.87 7.93,101.8 LED30.2
  InnerBottom 0.1: v7.5,105.33 7.92,105.33 8.6,104.65 8.6,102.17 8.3,101.87 v8,101.87
  Bottom 0.1: IC2.44 7.72,105.55 v7.5,105.33
N$LEDB31_IC2_PIN38  (via drill 0.2)
  Top 0.1: v12.2,101.77 11.42,101.77 LED31.2
  InnerBottom 0.1: v10.55,105.51 10.95,105.51 11.2,105.27 11.2,102.67 12.1,101.77 v12.2,101.77
  Bottom 0.1: IC2.38 10.72,105.67 v10.55,105.51
N$LEDB32_IC2_PIN32  (via drill 0.2)
  Top 0.1: v16.5,101.77 15.65,101.77 LED32.2
  InnerBottom 0.1: v13.7,105.33 14.5,105.33 14.8,105.03 14.8,102.67 15.7,101.77 v16.5,101.77
  Bottom 0.1: IC2.32 13.72,105.35 v13.7,105.33
N$LEDB33_IC3_PIN4  (via drill 0.2 pad 0.4)  (1 unrouted)
  Top 0.1: v2.9,96.38 2.9,97.55 LED33.2
  Bottom 0.1: IC3.4 3.22,96.7 v2.9,96.38
N$LEDB34_IC3_PIN10  (via drill 0.2)  (1 unrouted)
  Top 0.1: v6.22,96.43 7.15,97.36 LED34.2
  Bottom 0.1: IC3.10 v6.22,96.43
N$LEDB35_IC3_PIN16  (via drill 0.2)  (1 unrouted)
  Top 0.1: v12.24,98.9 12.24,98.07 11.73,97.57 LED35.2
  InnerBottom 0.1: v12.24,98.9 10.5,98.9 10.47,98.88 9.02,98.88 v8.9,98.76
  Bottom 0.1: IC3.16 9.22,98.45 v8.9,98.76
N$LEDB36_IC3_PIN22  (via drill 0.2)  (1 unrouted)
  Top 0.1: v15.65,96.48 15.65,97.53 LED36.2
  InnerBottom 0.1: v12.33,96.43 15.61,96.43 v15.65,96.48
  Bottom 0.1: IC3.22 12.32,97.47 12.32,96.73 12.33,96.72 v12.33,96.43
N$LEDB37_IC3_PIN7  (via drill 0.2 pad 0.4)
  Top 0.1: v3.7,93.33 LED37.2
  InnerBottom 0.1: v4.7,95.47 4.2,94.97 4.2,93.73 3.8,93.33 v3.7,93.33
  Bottom 0.1: IC3.7 4.7,97.56 v4.7,95.47 | v4.7,95.47
N$LEDB38_IC3_PIN13  (via drill 0.2)
  Top 0.1: v5.5,92.63 6.45,92.63 LED38.2
  InnerBottom 0.1: v7.71,96.43 5.5,94.22 v5.5,92.63
  Bottom 0.1: IC3.13 v7.72,96.44 v7.71,96.43
N$LEDB39_IC3_PIN19  (via drill 0.2)
  Top 0.1: v11.4,92.63 11.38,92.65 LED39.2
  InnerBottom 0.1: v10.4,96.38 10.6,96.18 10.6,92.93 10.9,92.63 v11.4,92.63
  Bottom 0.1: IC3.19 10.72,96.68 10.7,96.68 v10.4,96.38
N$LEDB40_IC3_PIN25  (via drill 0.2)
  Top 0.1: v15.5,92.63 15.62,92.75 LED40.2
  InnerBottom 0.1: v13.6,95.93 13.6,94.53 v15.5,92.63
  Bottom 0.1: IC3.25 13.72,96.04 v13.6,95.93
N$LEDB41_IC3_PIN53  (via drill 0.2)
  Top 0.1: v3.1,88.43 2.92,88.62 LED41.2
  Bottom 0.1: IC3.53 3.22,88.55 v3.1,88.43
N$LEDB42_IC3_PIN47  (via drill 0.2)
  Top 0.1: v6.34,88.6 6.65,88.6 LED42.2
  Bottom 0.1: IC3.47 6.22,88.72 v6.34,88.6
N$LEDB43_IC3_PIN41  (1 unrouted)
N$LEDB44_IC3_PIN35  (via drill 0.2)
  Top 0.1: v14.9,91.69 14.9,89.31 15.11,89.1 LED44.2
  Bottom 0.1: IC3.35 12.22,90.74 12.97,91.49 14.7,91.49 v14.9,91.69
N$LEDB45_IC3_PIN50  (via drill 0.2)  (1 unrouted)
  Top 0.1: v3.74,84.9 3.71,84.87 LED45.2
  InnerBottom 0.1: v4.59,88.84 4.79,88.84 5.59,88.04 5.59,87.12 4.3,85.83 4.3,85.43 3.76,84.9 v3.74,84.9
  Bottom 0.1: IC3.50 4.72,88.97 v4.59,88.84
N$LEDB46_IC3_PIN44  (via drill 0.2)  (1 unrouted)
  Top 0.1: v8,84.93 7.93,84.87 LED46.2
  InnerBottom 0.1: v7.5,88.4 7.92,88.4 8.6,87.72 8.6,85.23 8.3,84.93 v8,84.93
  Bottom 0.1: IC3.44 7.72,88.61 v7.5,88.4
N$LEDB47_IC3_PIN38  (via drill 0.2)  (1 unrouted)
  Top 0.1: v12.2,84.83 11.42,84.83 LED47.2
  InnerBottom 0.1: v10.55,88.58 10.95,88.58 11.2,88.33 11.2,85.73 12.1,84.83 v12.2,84.83
  Bottom 0.1: IC3.38 10.72,88.74 v10.55,88.58
N$LEDB48_IC3_PIN32  (via drill 0.2)  (1 unrouted)
  Top 0.1: v16.5,84.83 15.65,84.83 LED48.2
  InnerBottom 0.1: v13.7,88.4 14.5,88.4 14.8,88.1 14.8,85.73 15.7,84.83 v16.5,84.83
  Bottom 0.1: IC3.32 13.72,88.41 v13.7,88.4
N$LEDB49_IC4_PIN4  (via drill 0.2 pad 0.4)
  Top 0.1: v2.9,79.45 2.9,80.62 LED49.2
  Bottom 0.1: IC4.4 3.22,79.77 v2.9,79.45
N$LEDB50_IC4_PIN10  (via drill 0.2)
  Top 0.1: v6.22,79.5 7.15,80.43 LED50.2
  Bottom 0.1: IC4.10 v6.22,79.5
N$LEDB51_IC4_PIN16  (via drill 0.2)
  Top 0.1: v12.24,81.97 12.24,81.14 11.73,80.63 LED51.2
  InnerBottom 0.1: v12.24,81.97 10.5,81.97 10.47,81.95 9.02,81.95 v8.9,81.83
  Bottom 0.1: IC4.16 9.22,81.51 v8.9,81.83
N$LEDB52_IC4_PIN22  (via drill 0.2)
  Top 0.1: v15.65,79.55 15.65,80.6 LED52.2
  InnerBottom 0.1: v12.33,79.5 15.61,79.5 v15.65,79.55
  Bottom 0.1: IC4.22 12.32,80.54 12.32,79.8 12.33,79.79 v12.33,79.5
N$LEDB53_IC4_PIN7  (via drill 0.2 pad 0.4)
  Top 0.1: v3.7,76.4 LED53.2
  InnerBottom 0.1: v4.7,78.54 4.2,78.04 4.2,76.8 3.8,76.4 v3.7,76.4
  Bottom 0.1: IC4.7 4.7,80.62 v4.7,78.54 | v4.7,78.54
N$LEDB54_IC4_PIN13  (via drill 0.2)
  Top 0.1: v5.5,75.7 6.45,75.7 LED54.2
  InnerBottom 0.1: v7.71,79.49 5.5,77.29 v5.5,75.7
  Bottom 0.1: IC4.13 7.72,79.5 v7.71,79.49
N$LEDB55_IC4_PIN19  (via drill 0.2)
  Top 0.1: v11.4,75.7 11.38,75.72 LED55.2
  InnerBottom 0.1: v10.4,79.45 10.6,79.25 10.6,76 10.9,75.7 v11.4,75.7
  Bottom 0.1: IC4.19 10.72,79.75 10.7,79.75 v10.4,79.45
N$LEDB56_IC4_PIN25  (via drill 0.2)
  Top 0.1: v15.5,75.7 15.62,75.82 LED56.2
  InnerBottom 0.1: v13.6,78.99 13.6,77.6 v15.5,75.7
  Bottom 0.1: IC4.25 13.72,79.11 v13.6,78.99
N$LEDB57_IC4_PIN53  (via drill 0.2)
  Top 0.1: v3.1,71.5 2.92,71.68 LED57.2
  Bottom 0.1: IC4.53 3.22,71.62 v3.1,71.5
N$LEDB58_IC4_PIN47  (via drill 0.2)
  Top 0.1: v6.34,71.66 6.65,71.66 LED58.2
  Bottom 0.1: IC4.47 6.22,71.78 v6.34,71.66
N$LEDB59_IC4_PIN41  (1 unrouted)
N$LEDB60_IC4_PIN35  (via drill 0.2)
  Top 0.1: v14.9,74.76 14.9,72.38 15.11,72.17 LED60.2
  Bottom 0.1: IC4.35 12.22,73.8 12.97,74.56 14.7,74.56 v14.9,74.76
N$LEDB61_IC4_PIN50  (via drill 0.2)
  Top 0.1: v3.74,67.96 3.71,67.93 LED61.2
  InnerBottom 0.1: v4.59,71.91 4.79,71.91 5.59,71.11 5.59,70.19 4.3,68.9 4.3,68.5 3.76,67.96 v3.74,67.96
  Bottom 0.1: IC4.50 4.72,72.03 v4.59,71.91
N$LEDB62_IC4_PIN44  (via drill 0.2)
  Top 0.1: v8,68 7.93,67.93 LED62.2
  InnerBottom 0.1: v7.5,71.46 7.92,71.46 8.6,70.78 8.6,68.3 8.3,68 v8,68
  Bottom 0.1: IC4.44 7.72,71.68 v7.5,71.46
N$LEDB63_IC4_PIN38  (via drill 0.2)
  Top 0.1: v12.2,67.9 11.42,67.9 LED63.2
  InnerBottom 0.1: v10.55,71.65 10.95,71.65 11.2,71.4 11.2,68.8 12.1,67.9 v12.2,67.9
  Bottom 0.1: IC4.38 10.72,71.81 v10.55,71.65
N$LEDB64_IC4_PIN32  (via drill 0.2)
  Top 0.1: v16.5,67.9 15.65,67.9 LED64.2
  InnerBottom 0.1: v13.7,71.46 14.5,71.46 14.8,71.16 14.8,68.8 15.7,67.9 v16.5,67.9
  Bottom 0.1: IC4.32 13.72,71.48 v13.7,71.46
N$LEDB65_IC5_PIN4  (via drill 0.2 pad 0.4)
  Top 0.1: v2.9,62.52 2.9,63.68 LED65.2
  Bottom 0.1: IC5.4 3.22,62.83 v2.9,62.52
N$LEDB66_IC5_PIN10  (via drill 0.2)
  Top 0.1: v6.22,62.57 7.15,63.5 LED66.2
  Bottom 0.1: IC5.10 v6.22,62.57
N$LEDB67_IC5_PIN16  (via drill 0.2)
  Top 0.1: v12.24,65.04 12.24,64.2 11.73,63.7 LED67.2
  InnerBottom 0.1: v12.24,65.04 10.5,65.04 10.47,65.01 9.02,65.01 v8.9,64.9
  Bottom 0.1: IC5.16 9.22,64.58 v8.9,64.9
N$LEDB68_IC5_PIN22  (via drill 0.2)
  Top 0.1: v15.65,62.61 15.65,63.66 LED68.2
  InnerBottom 0.1: v12.33,62.56 15.61,62.56 v15.65,62.61
  Bottom 0.1: IC5.22 12.32,63.61 12.32,62.86 12.33,62.85 v12.33,62.56
N$LEDB69_IC5_PIN7  (via drill 0.2 pad 0.4)
  Top 0.1: v3.7,59.47 LED69.2
  InnerBottom 0.1: v4.7,61.61 4.2,61.11 4.2,59.87 3.8,59.47 v3.7,59.47
  Bottom 0.1: IC5.7 4.7,63.69 v4.7,61.61 | v4.7,61.61
N$LEDB70_IC5_PIN13  (via drill 0.2)
  Top 0.1: v5.5,58.76 6.45,58.76 LED70.2
  InnerBottom 0.1: v7.71,62.56 5.5,60.35 v5.5,58.76
  Bottom 0.1: IC5.13 v7.72,62.57 v7.71,62.56
N$LEDB71_IC5_PIN19  (via drill 0.2)
  Top 0.1: v11.4,58.77 11.38,58.78 LED71.2
  InnerBottom 0.1: v10.4,62.51 10.6,62.31 10.6,59.07 10.9,58.77 v11.4,58.77
  Bottom 0.1: IC5.19 10.72,62.81 10.7,62.81 v10.4,62.51
N$LEDB72_IC5_PIN25  (via drill 0.2)
  Top 0.1: v15.5,58.77 15.62,58.88 LED72.2
  InnerBottom 0.1: v13.6,62.06 13.6,60.67 v15.5,58.77
  Bottom 0.1: IC5.25 13.72,62.18 v13.6,62.06
N$LEDB73_IC5_PIN53  (via drill 0.2)  (1 unrouted)
  Top 0.1: v3.1,54.57 2.92,54.75 LED73.2
  Bottom 0.1: IC5.53 3.22,54.68 v3.1,54.57
N$LEDB74_IC5_PIN47  (via drill 0.2)  (1 unrouted)
  Top 0.1: v6.34,54.73 6.65,54.73 LED74.2
  Bottom 0.1: IC5.47 6.22,54.85 v6.34,54.73
N$LEDB75_IC5_PIN41  (1 unrouted)
N$LEDB76_IC5_PIN35  (via drill 0.2)  (1 unrouted)
  Top 0.1: v14.9,57.82 14.9,55.45 15.11,55.23 LED76.2
  Bottom 0.1: IC5.35 12.22,56.87 12.97,57.62 14.7,57.62 v14.9,57.82
N$LEDB77_IC5_PIN50  (via drill 0.2)
  Top 0.1: v3.74,51.03 3.71,51 LED77.2
  InnerBottom 0.1: v4.59,54.97 4.79,54.97 5.59,54.17 5.59,53.26 4.3,51.97 4.3,51.57 3.76,51.03 v3.74,51.03
  Bottom 0.1: IC5.50 4.72,55.1 v4.59,54.97
N$LEDB78_IC5_PIN44  (via drill 0.2)
  Top 0.1: v8,51.07 7.93,51 LED78.2
  InnerBottom 0.1: v7.5,54.53 7.92,54.53 8.6,53.85 8.6,51.37 8.3,51.07 v8,51.07
  Bottom 0.1: IC5.44 7.72,54.75 v7.5,54.53
N$LEDB79_IC5_PIN38  (via drill 0.2)
  Top 0.1: v12.2,50.97 11.42,50.97 LED79.2
  InnerBottom 0.1: v10.55,54.71 10.95,54.71 11.2,54.47 11.2,51.87 12.1,50.97 v12.2,50.97
  Bottom 0.1: IC5.38 10.72,54.88 v10.55,54.71
N$LEDB80_IC5_PIN32  (via drill 0.2)
  Top 0.1: v16.5,50.97 15.65,50.97 LED80.2
  InnerBottom 0.1: v13.7,54.53 14.5,54.53 14.8,54.23 14.8,51.87 15.7,50.97 v16.5,50.97
  Bottom 0.1: IC5.32 13.72,54.55 v13.7,54.53
N$LEDB81_IC6_PIN4  (via drill 0.2 pad 0.4)  (1 unrouted)
  Top 0.1: v2.9,45.58 2.9,46.75 LED81.2
  Bottom 0.1: IC6.4 3.22,45.9 v2.9,45.58
N$LEDB82_IC6_PIN10  (via drill 0.2)  (1 unrouted)
  Top 0.1: v6.22,45.63 7.15,46.56 LED82.2
  Bottom 0.1: IC6.10 v6.22,45.63
N$LEDB83_IC6_PIN16  (via drill 0.2)  (1 unrouted)
  Top 0.1: v12.24,48.1 12.24,47.27 11.73,46.77 LED83.2
  InnerBottom 0.1: v12.24,48.1 10.5,48.1 10.47,48.08 9.02,48.08 v8.9,47.96
  Bottom 0.1: IC6.16 9.22,47.65 v8.9,47.96
N$LEDB84_IC6_PIN22  (via drill 0.2)  (1 unrouted)
  Top 0.1: v15.65,45.68 15.65,46.73 LED84.2
  InnerBottom 0.1: v12.33,45.63 15.61,45.63 v15.65,45.68
  Bottom 0.1: IC6.22 12.32,46.67 12.32,45.93 12.33,45.92 v12.33,45.63
N$LEDB85_IC6_PIN7  (via drill 0.2 pad 0.4)
  Top 0.1: v3.7,42.53 LED85.2
  InnerBottom 0.1: v4.7,44.67 4.2,44.17 4.2,42.93 3.8,42.53 v3.7,42.53
  Bottom 0.1: IC6.7 4.7,46.75 v4.7,44.67 | v4.7,44.67
N$LEDB86_IC6_PIN13  (via drill 0.2)
  Top 0.1: v5.5,41.83 6.45,41.83 LED86.2
  InnerBottom 0.1: v7.71,45.63 5.5,43.42 v5.5,41.83
  Bottom 0.1: IC6.13 v7.72,45.64 v7.71,45.63
N$LEDB87_IC6_PIN19  (via drill 0.2)
  Top 0.1: v11.4,41.83 11.38,41.85 LED87.2
  InnerBottom 0.1: v10.4,45.58 10.6,45.38 10.6,42.13 10.9,41.83 v11.4,41.83
  Bottom 0.1: IC6.19 10.72,45.88 10.7,45.88 v10.4,45.58
N$LEDB88_IC6_PIN25  (via drill 0.2)
  Top 0.1: v15.5,41.83 15.62,41.95 LED88.2
  InnerBottom 0.1: v13.6,45.13 13.6,43.73 v15.5,41.83
  Bottom 0.1: IC6.25 13.72,45.24 v13.6,45.13
N$LEDB89_IC6_PIN53  (via drill 0.2)
  Top 0.1: v3.1,37.63 2.92,37.82 LED89.2
  Bottom 0.1: IC6.53 3.22,37.75 v3.1,37.63
N$LEDB90_IC6_PIN47  (via drill 0.2)
  Top 0.1: v6.34,37.8 6.65,37.8 LED90.2
  Bottom 0.1: IC6.47 6.22,37.92 v6.34,37.8
N$LEDB91_IC6_PIN41  (1 unrouted)
N$LEDB92_IC6_PIN35  (via drill 0.2)
  Top 0.1: v14.9,40.89 14.9,38.51 15.11,38.3 LED92.2
  Bottom 0.1: IC6.35 12.22,39.94 12.97,40.69 14.7,40.69 v14.9,40.89
N$LEDB93_IC6_PIN50  (via drill 0.2)  (1 unrouted)
  Top 0.1: v3.74,34.1 3.71,34.07 LED93.2
  InnerBottom 0.1: v4.59,38.04 4.79,38.04 5.59,37.24 5.59,36.33 4.3,35.03 4.3,34.63 3.76,34.1 v3.74,34.1
  Bottom 0.1: IC6.50 4.72,38.17 v4.59,38.04
N$LEDB94_IC6_PIN44  (via drill 0.2)  (1 unrouted)
  Top 0.1: v8,34.13 7.93,34.07 LED94.2
  InnerBottom 0.1: v7.5,37.6 7.92,37.6 8.6,36.92 8.6,34.43 8.3,34.13 v8,34.13
  Bottom 0.1: IC6.44 7.72,37.81 v7.5,37.6
N$LEDB95_IC6_PIN38  (via drill 0.2)  (1 unrouted)
  Top 0.1: v12.2,34.03 11.42,34.03 LED95.2
  InnerBottom 0.1: v10.55,37.78 10.95,37.78 11.2,37.53 11.2,34.93 12.1,34.03 v12.2,34.03
  Bottom 0.1: IC6.38 10.72,37.94 v10.55,37.78
N$LEDB96_IC6_PIN32  (via drill 0.2)  (1 unrouted)
  Top 0.1: v16.5,34.03 15.65,34.03 LED96.2
  InnerBottom 0.1: v13.7,37.6 14.5,37.6 14.8,37.3 14.8,34.93 15.7,34.03 v16.5,34.03
  Bottom 0.1: IC6.32 13.72,37.61 v13.7,37.6
N$LEDB97_IC7_PIN4  (via drill 0.2 pad 0.4)
  Top 0.1: v2.9,28.65 2.9,29.82 LED97.2
  Bottom 0.1: IC7.4 3.22,28.97 v2.9,28.65
N$LEDB98_IC7_PIN10  (via drill 0.2)
  Top 0.1: v6.22,28.7 7.15,29.63 LED98.2
  Bottom 0.1: IC7.10 v6.22,28.7
N$LEDB99_IC7_PIN16  (via drill 0.2)
  Top 0.1: v12.24,31.17 12.24,30.34 11.73,29.83 LED99.2
  InnerBottom 0.1: v12.24,31.17 10.5,31.17 10.47,31.15 9.02,31.15 v8.9,31.03
  Bottom 0.1: IC7.16 9.22,30.71 v8.9,31.03
N$LEDB100_IC7_PIN22  (via drill 0.2)
  Top 0.1: v15.65,28.75 15.65,29.8 LED100.2
  InnerBottom 0.1: v12.33,28.7 15.61,28.7 v15.65,28.75
  Bottom 0.1: IC7.22 12.32,29.74 12.32,29 12.33,28.99 v12.33,28.7
N$LEDB101_IC7_PIN7  (via drill 0.2 pad 0.4)
  Top 0.1: v3.7,25.6 LED101.2
  InnerBottom 0.1: v4.7,27.74 4.2,27.24 4.2,26 3.8,25.6 v3.7,25.6
  Bottom 0.1: IC7.7 4.7,29.82 v4.7,27.74 | v4.7,27.74
N$LEDB102_IC7_PIN13  (via drill 0.2)
  Top 0.1: v5.5,24.9 6.45,24.9 LED102.2
  InnerBottom 0.1: v7.71,28.69 5.5,26.49 v5.5,24.9
  Bottom 0.1: IC7.13 7.72,28.7 v7.71,28.69
N$LEDB103_IC7_PIN19  (via drill 0.2)
  Top 0.1: v11.4,24.9 11.38,24.92 LED103.2
  InnerBottom 0.1: v10.4,28.65 10.6,28.45 10.6,25.2 10.9,24.9 v11.4,24.9
  Bottom 0.1: IC7.19 10.72,28.95 10.7,28.95 v10.4,28.65
N$LEDB104_IC7_PIN25  (via drill 0.2)
  Top 0.1: v15.5,24.9 15.62,25.02 LED104.2
  InnerBottom 0.1: v13.6,28.19 13.6,26.8 v15.5,24.9
  Bottom 0.1: IC7.25 13.72,28.31 v13.6,28.19
N$LEDB105_IC7_PIN53  (via drill 0.2)
  Top 0.1: v3.1,20.7 2.92,20.88 LED105.2
  Bottom 0.1: IC7.53 3.22,20.82 v3.1,20.7
N$LEDB106_IC7_PIN47  (via drill 0.2)
  Top 0.1: v6.34,20.86 6.65,20.86 LED106.2
  Bottom 0.1: IC7.47 6.22,20.98 v6.34,20.86
N$LEDB107_IC7_PIN41  (1 unrouted)
N$LEDB108_IC7_PIN35  (via drill 0.2)
  Top 0.1: v14.9,23.96 14.9,21.58 15.11,21.37 LED108.2
  Bottom 0.1: IC7.35 12.22,23 12.97,23.76 14.7,23.76 v14.9,23.96
N$LEDB109_IC7_PIN50  (via drill 0.2)
  Top 0.1: v3.74,17.16 3.71,17.13 LED109.2
  InnerBottom 0.1: v4.59,21.11 4.79,21.11 5.59,20.31 5.59,19.39 4.3,18.1 4.3,17.7 3.76,17.16 v3.74,17.16
  Bottom 0.1: IC7.50 4.72,21.23 v4.59,21.11
N$LEDB110_IC7_PIN44  (via drill 0.2)
  Top 0.1: v8,17.2 7.93,17.13 LED110.2
  InnerBottom 0.1: v7.5,20.66 7.92,20.66 8.6,19.98 8.6,17.5 8.3,17.2 v8,17.2
  Bottom 0.1: IC7.44 7.72,20.88 v7.5,20.66
N$LEDB111_IC7_PIN38  (via drill 0.2)
  Top 0.1: v12.2,17.1 11.42,17.1 LED111.2
  InnerBottom 0.1: v10.55,20.85 10.95,20.85 11.2,20.6 11.2,18 12.1,17.1 v12.2,17.1
  Bottom 0.1: IC7.38 10.72,21.01 v10.55,20.85
N$LEDB112_IC7_PIN32  (via drill 0.2)
  Top 0.1: v16.5,17.1 15.65,17.1 LED112.2
  InnerBottom 0.1: v13.7,20.66 14.5,20.66 14.8,20.36 14.8,18 15.7,17.1 v16.5,17.1
  Bottom 0.1: IC7.32 13.72,20.68 v13.7,20.66
N$LEDB113_IC8_PIN4  (1 unrouted)
N$LEDB114_IC8_PIN10  (1 unrouted)
N$LEDB115_IC8_PIN16  (1 unrouted)
N$LEDB116_IC8_PIN22  (1 unrouted)
N$LEDB117_IC8_PIN7  (1 unrouted)
N$LEDB118_IC8_PIN13  (1 unrouted)
N$LEDB119_IC8_PIN19  (1 unrouted)
N$LEDB120_IC8_PIN25  (1 unrouted)
N$LEDG1_IC1_PIN6  (via drill 0.2 pad 0.4)
  Top 0.1: v4.22,132.6 4.05,132.43 3.02,132.43 LED1.1
  Bottom 0.1: IC1.6 v4.22,132.6
N$LEDG2_IC1_PIN12  (via drill 0.2)
  Top 0.1: v7.1,133 7.1,132.38 LED2.1
  Bottom 0.1: IC1.12 7.22,132.88 v7.1,133
N$LEDG3_IC1_PIN18  (via drill 0.2)
  Top 0.1: v10.29,133.2 10.52,133.2 LED3.1
  Bottom 0.1: IC1.18 10.22,133.13 v10.29,133.2
N$LEDG4_IC1_PIN24  (via drill 0.2)
  Top 0.1: v13.4,133.03 14.92,133.03 LED4.1
  Bottom 0.1: IC1.24 13.22,132.25 13.28,132.32 13.28,132.91 v13.4,133.03
N$LEDG5_IC1_PIN9  (via drill 0.2 pad 0.4)
  Top 0.1: v3.7,128.1 LED5.1
  InnerBottom 0.1: v5.7,129.9 5.7,129.88 5.74,129.84 4.54,129.84 3.7,129 v3.7,128.1
  Bottom 0.1: IC1.9 5.72,129.92 v5.7,129.9
N$LEDG6_IC1_PIN15  (via drill 0.2)
  Top 0.1: v9,130.25 9,129.95 LED6.1
  Bottom 0.1: IC1.15 8.72,130.53 v9,130.25
N$LEDG7_IC1_PIN21  (via drill 0.2)
  Top 0.1: v11.82,128.8 11.78,128.75 11.78,128.59 11.38,128.2 LED7.1
  InnerBottom 0.1: v11.78,130.35 11.82,130.3 v11.82,128.8
  Bottom 0.1: IC1.21 11.72,130.62 11.72,130.61 11.72,130.4 v11.78,130.35
N$LEDG8_IC1_PIN27  (via drill 0.2)
  Top 0.1: v14.75,129.6 14.75,128.96 LED8.1
  Bottom 0.1: IC1.27 14.72,129.64 v14.75,129.6
N$LEDG9_IC1_PIN51  (via drill 0.2)
  Top 0.1: v3.77,122.6 3.77,123.43 3.33,123.87 LED9.1
  Bottom 0.1: IC1.51 4.22,123.05 v3.77,122.6
N$LEDG10_IC1_PIN45  (via drill 0.2)
  Top 0.1: v6.97,125.07 6.97,124.05 LED10.1
  Bottom 0.1: IC1.45 7.22,124.82 v6.97,125.07
N$LEDG11_IC1_PIN39  (via drill 0.2)
  Top 0.1: v10.6,125.05 11.38,124.27 LED11.1
  Bottom 0.1: IC1.39 10.22,124.67 v10.6,125.05
N$LEDG12_IC1_PIN33  (via drill 0.2)
  Top 0.1: v15.6,125.05 15.62,125.04 LED12.1
  Bottom 0.1: IC1.33 13.32,123.96 13.32,124.7 13.67,125.05 v15.6,125.05
N$LEDG13_IC1_PIN48  (via drill 0.2)
  Top 0.1: v3.8,119.7 2.98,119.7 LED13.1
  InnerBottom 0.1: v5.05,121.67 5.05,120.95 v3.8,119.7
  Bottom 0.1: IC1.48 5.62,123.76 5.62,122.3 5.05,121.73 v5.05,121.67
N$LEDG14_IC1_PIN42  (via drill 0.2)
  Top 0.1: v8.1,119.7 8.03,119.63 LED14.1
  InnerBottom 0.1: v8.1,121.35 v8.1,121.34 v8.1,119.7
  Bottom 0.1: IC1.42 8.72,122.32 8.1,121.7 v8.1,121.35
N$LEDG15_IC1_PIN36  (via drill 0.2)
  Top 0.1: v12.2,119.7 12.13,119.63 LED15.1
  InnerBottom 0.1: v11.7,122.26 11.7,120.2 v12.2,119.7
  Bottom 0.1: IC1.36 11.72,122.28 v11.7,122.26
N$LEDG16_IC1_PIN30  (via drill 0.2)
  Top 0.1: v16.4,119.6 15.65,119.6 LED16.1
  InnerBottom 0.1: v15.21,122.26 15.21,119.89 15.5,119.6 v16.4,119.6
  Bottom 0.1: IC1.30 14.72,122.76 v15.21,122.26
N$LEDG17_IC2_PIN6  (via drill 0.2 pad 0.4)
  Top 0.1: v4.22,115.67 4.05,115.5 3.02,115.5 LED17.1
  Bottom 0.1: IC2.6 v4.22,115.66 v4.22,115.67
N$LEDG18_IC2_PIN12  (via drill 0.2)
  Top 0.1: v7.1,116.07 7.1,115.45 LED18.1
  Bottom 0.1: IC2.12 7.22,115.95 v7.1,116.07
N$LEDG19_IC2_PIN18  (via drill 0.2)
  Top 0.1: v10.29,116.27 10.52,116.27 LED19.1
  Bottom 0.1: IC2.18 10.22,116.2 v10.29,116.27
N$LEDG20_IC2_PIN24  (via drill 0.2)
  Top 0.1: v13.4,116.1 14.92,116.1 LED20.1
  Bottom 0.1: IC2.24 13.22,115.32 13.28,115.38 13.28,115.97 v13.4,116.1
N$LEDG21_IC2_PIN9  (via drill 0.2 pad 0.4)
  Top 0.1: v3.7,111.17 LED21.1
  InnerBottom 0.1: v5.7,112.97 5.7,112.95 5.74,112.91 4.54,112.91 3.7,112.07 v3.7,111.17
  Bottom 0.1: IC2.9 5.72,112.98 v5.7,112.97
N$LEDG22_IC2_PIN15  (via drill 0.2)
  Top 0.1: v9,113.31 9,113.01 LED22.1
  Bottom 0.1: IC2.15 8.72,113.6 v9,113.31
N$LEDG23_IC2_PIN21  (via drill 0.2)
  Top 0.1: v11.82,111.87 11.78,111.82 11.78,111.66 11.38,111.27 LED23.1
  InnerBottom 0.1: v11.78,113.42 11.82,113.37 v11.82,111.87
  Bottom 0.1: IC2.21 11.72,113.69 11.72,113.68 11.72,113.47 v11.78,113.42
N$LEDG24_IC2_PIN27  (via drill 0.2)
  Top 0.1: v14.75,112.67 14.75,112.03 LED24.1
  Bottom 0.1: IC2.27 14.72,112.7 v14.75,112.67
N$LEDG25_IC2_PIN51  (via drill 0.2)  (1 unrouted)
  Top 0.1: v3.77,105.67 3.77,106.5 3.33,106.93 LED25.1
  Bottom 0.1: IC2.51 4.22,106.11 v3.77,105.67
N$LEDG26_IC2_PIN45  (via drill 0.2)  (1 unrouted)
  Top 0.1: v6.97,108.13 6.97,107.12 LED26.1
  Bottom 0.1: IC2.45 7.22,107.88 v6.97,108.13
N$LEDG27_IC2_PIN39  (via drill 0.2)  (1 unrouted)
  Top 0.1: v10.6,108.12 11.38,107.34 LED27.1
  Bottom 0.1: IC2.39 10.22,107.74 v10.6,108.12
N$LEDG28_IC2_PIN33  (via drill 0.2)  (1 unrouted)
  Top 0.1: v15.6,108.12 15.62,108.1 LED28.1
  Bottom 0.1: IC2.33 13.32,107.03 13.32,107.77 13.67,108.12 v15.6,108.12
N$LEDG29_IC2_PIN48  (via drill 0.2)
  Top 0.1: v3.8,102.77 2.98,102.77 LED29.1
  InnerBottom 0.1: v5.05,104.73 5.05,104.01 v3.8,102.77
  Bottom 0.1: IC2.48 5.62,106.83 5.62,105.37 5.05,104.8 v5.05,104.73
N$LEDG30_IC2_PIN42  (via drill 0.2)
  Top 0.1: v8.1,102.77 8.03,102.7 LED30.1
  InnerBottom 0.1: v8.1,104.41 v8.1,102.77
  Bottom 0.1: IC2.42 8.72,105.38 8.1,104.77 v8.1,104.41
N$LEDG31_IC2_PIN36  (via drill 0.2)
  Top 0.1: v12.2,102.77 12.13,102.7 LED31.1
  InnerBottom 0.1: v11.7,105.33 11.7,103.27 v12.2,102.77
  Bottom 0.1: IC2.36 11.72,105.35 v11.7,105.33
N$LEDG32_IC2_PIN30  (via drill 0.2)
  Top 0.1: v16.4,102.67 15.65,102.67 LED32.1
  InnerBottom 0.1: v15.21,105.33 15.21,102.95 15.5,102.67 v16.4,102.67
  Bottom 0.1: IC2.30 14.72,105.83 v15.21,105.33
N$LEDG33_IC3_PIN6  (via drill 0.2 pad 0.4)  (1 unrouted)
  Top 0.1: v4.22,98.73 4.05,98.57 3.02,98.57 LED33.1
  Bottom 0.1: IC3.6 v4.22,98.73
N$LEDG34_IC3_PIN12  (via drill 0.2)  (1 unrouted)
  Top 0.1: v7.1,99.13 7.1,98.52 LED34.1
  Bottom 0.1: IC3.12 7.22,99.02 v7.1,99.13
N$LEDG35_IC3_PIN18  (via drill 0.2)  (1 unrouted)
  Top 0.1: v10.29,99.33 10.52,99.33 LED35.1
  Bottom 0.1: IC3.18 10.22,99.26 v10.29,99.33
N$LEDG36_IC3_PIN24  (via drill 0.2)  (1 unrouted)
  Top 0.1: v13.4,99.16 14.92,99.16 LED36.1
  Bottom 0.1: IC3.24 13.22,98.39 13.28,98.45 13.28,99.04 v13.4,99.16
N$LEDG37_IC3_PIN9  (via drill 0.2 pad 0.4)
  Top 0.1: v3.7,94.23 LED37.1
  InnerBottom 0.1: v5.7,96.03 5.7,96.02 5.74,95.97 4.54,95.97 3.7,95.13 v3.7,94.23
  Bottom 0.1: IC3.9 5.72,96.05 v5.7,96.03
N$LEDG38_IC3_PIN15  (via drill 0.2)
  Top 0.1: v9,96.38 9,96.08 LED38.1
  Bottom 0.1: IC3.15 8.72,96.66 v9,96.38
N$LEDG39_IC3_PIN21  (via drill 0.2)
  Top 0.1: v11.82,94.93 11.78,94.88 11.78,94.73 11.38,94.34 LED39.1
  InnerBottom 0.1: v11.78,96.48 11.82,96.44 v11.82,94.93
  Bottom 0.1: IC3.21 11.72,96.75 11.72,96.53 v11.78,96.48